# Altium PCB ATM90E3x-DB.PcbDoc
Units mil, origin at the board's own origin, x right, y up, seen from the top; angles counter-clockwise.
Board outline 4724.41 x 3543.31 mil, 2 copper layers (Top Layer, Bottom Layer); 106 components, 99 nets, 295 pads, 118 vias.
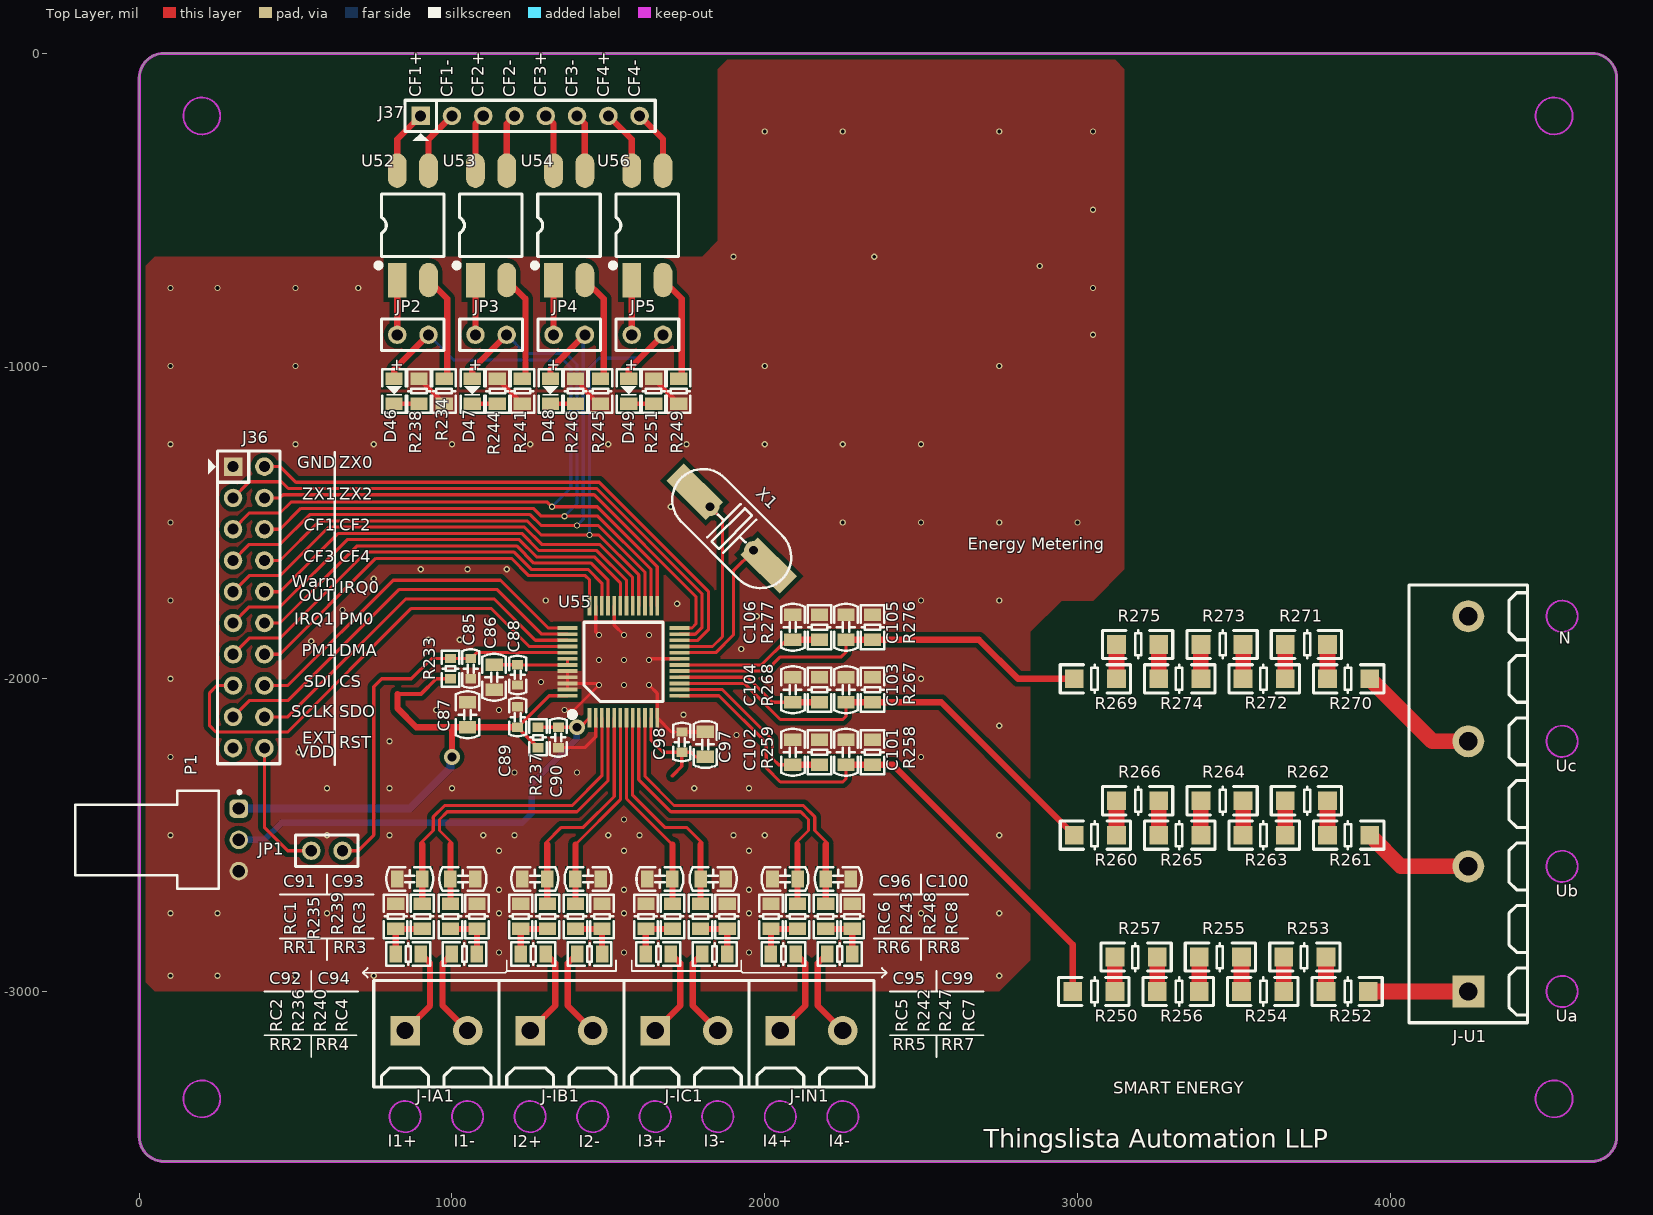
[diagram p0: Top Layer view]
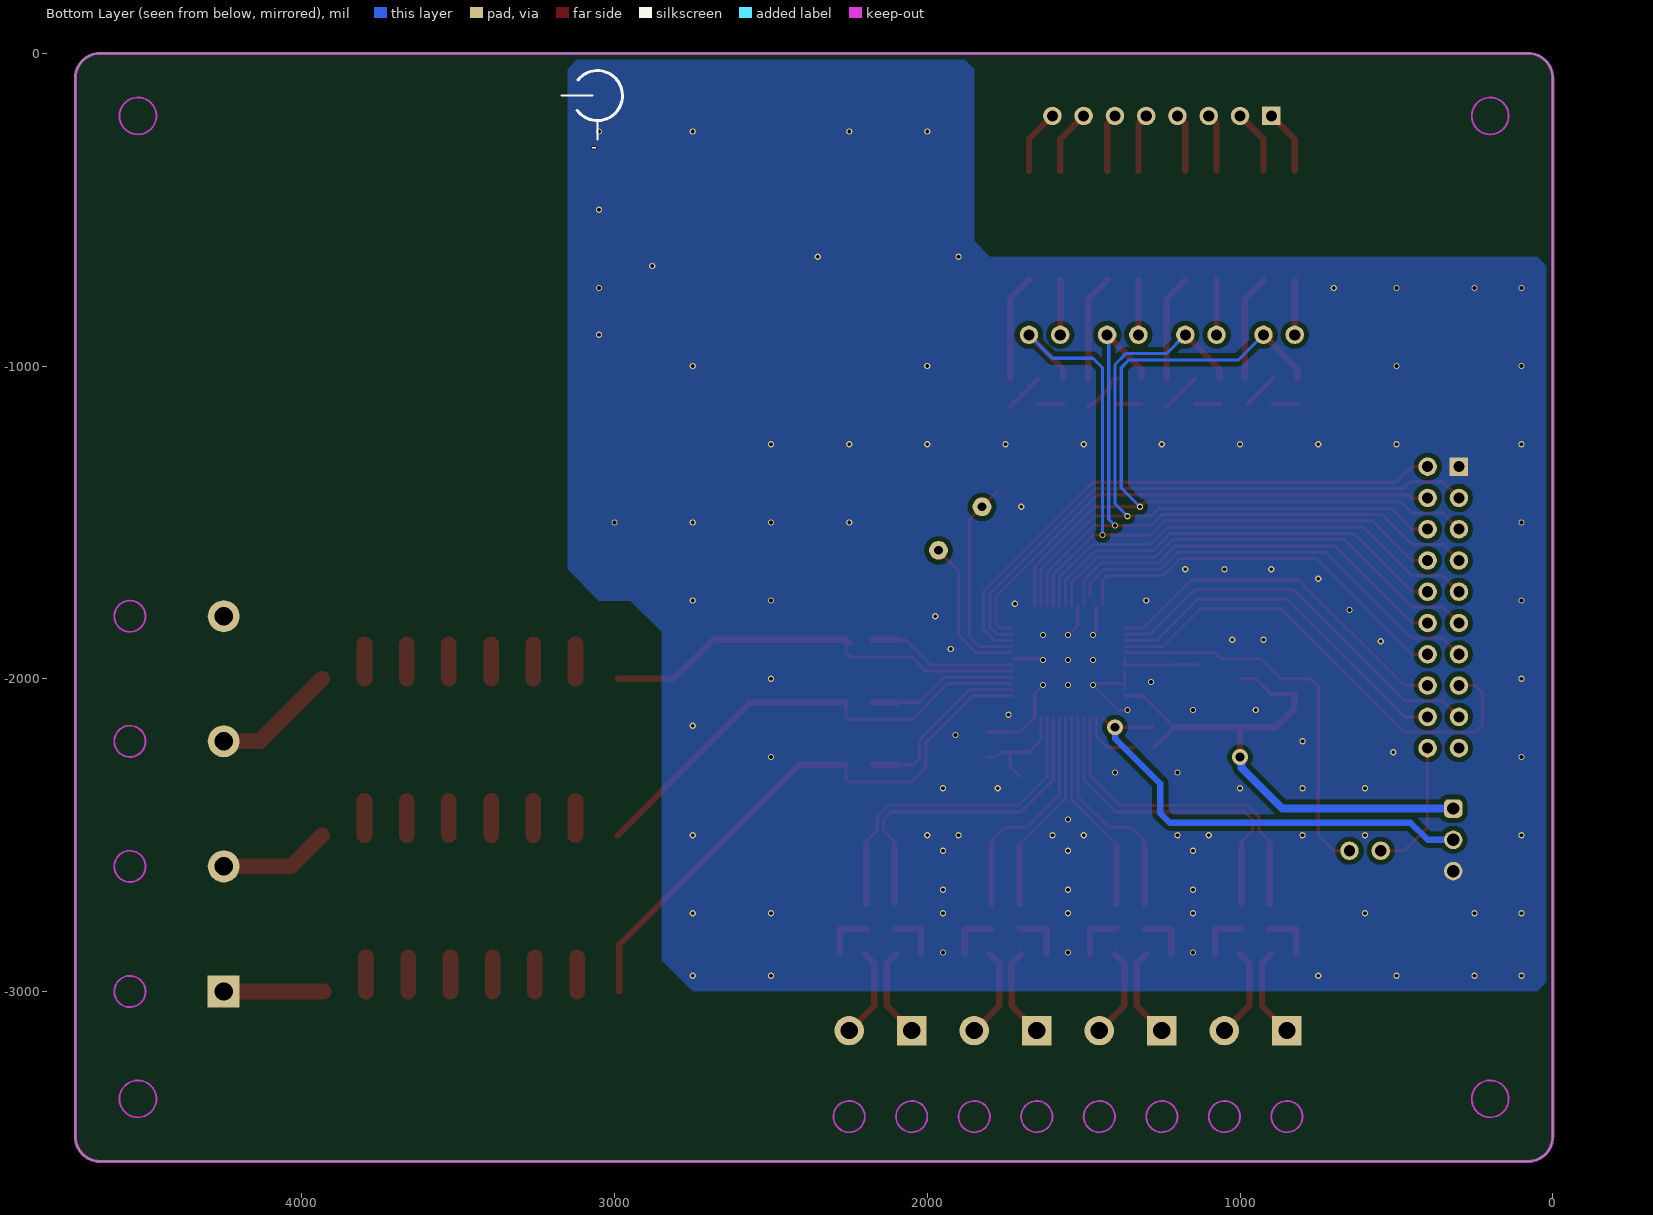
[diagram p1: Bottom Layer view, seen from below]
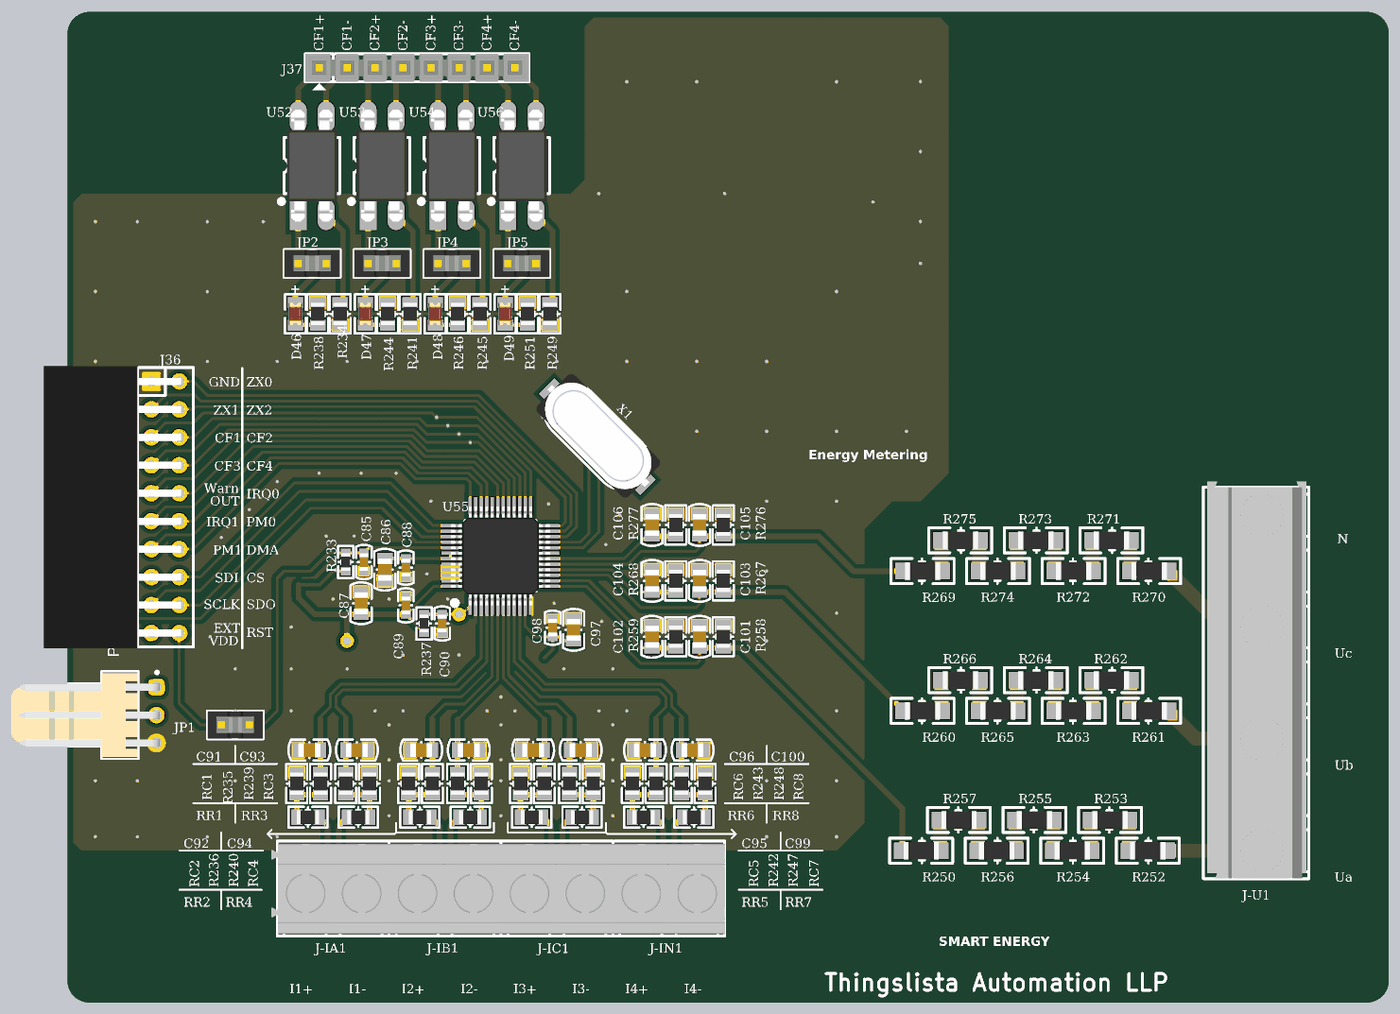
[diagram p2: 3D render of the assembled board from above, using the file's embedded part models]

## Layer stack, top to bottom
Top Solder: solder mask 0.4, Solder Resist, Dk 3.5
Top Layer: signal copper 1.4
Dielectric1: dielectric 12.6, FR-4, Dk 4.8
Bottom Layer: signal copper 1.4
Bottom Solder: solder mask 0.4, Solder Resist, Dk 3.5

## Board outline
0,-3464.57 ccw(c78.74,-3464.57) 78.74,-3543.31 4645.67,-3543.31 ccw(c4645.67,-3464.57) 4724.41,-3464.57 4724.41,-78.74 ccw(c4645.67,-78.74) 4645.67,0 78.74,0 ccw(c78.74,-78.74) 0,-78.74

## Design rules (kind name [scope] priority, off if disabled: settings)
Clearance TQFP-48 [InComponent('U7')] p1: gap=6 ignorepadtopadclearanceinfootprint=FALSE except(0: Arc-Hole Track-Hole SMDPad-Hole THPad-Hole Via-Hole Fill-Hole Poly-Hole Region-Hole Text-Hole)
Clearance Polygon [IsRegion] p2: gap=15 ignorepadtopadclearanceinfootprint=FALSE except(0: Arc-Hole Track-Hole SMDPad-Hole THPad-Hole Via-Hole Fill-Hole Poly-Hole Region-Hole Text-Hole)
Clearance [All] p3: gap=8 ignorepadtopadclearanceinfootprint=FALSE except(0: Arc-Hole Track-Hole SMDPad-Hole THPad-Hole Via-Hole Fill-Hole Poly-Hole Region-Hole Text-Hole)
MinimumSolderMaskSliver [All] p1 off: minsoldermaskwidth=10
NetAntennae [All] p1 off: netantennaetolerance=0
PolygonConnect [All] p1: connectstyle=Direct reliefconductorwidth=20 reliefentries=4 polygonreliefangle="90 Angle" airgapwidth=15
RoutingVias [All] p1: holewidth=28 width=50 viastyle="Through Hole" minholewidth=28 minwidth=50 maxholewidth=28 maxwidth=50
SilkToSilkClearance [All] p1 off: silktosilkclearance=10
SilkToSolderMaskClearance SilkscreenOverComponentPads [IsPad] p1 off: minsilkscreentomaskgap=10 clearancetoexposedcopper=TRUE
SolderMaskExpansion [All] p1: expansion=4 istentingtop=FALSE
Width [All] p1: maxlimit=100 minlimit=8 preferedwidth=10
26 further rules are at their usual default settings.

## Components (designator, comment, footprint, x,y, rotation, side; value= is the part's Value field where it differs from the comment)
C85 "0.1uF" C0603 1060,-2000 r90 top
C86 "10uF" C0805 1135,-1955 r270 top
C87 "10uF" C0805 1050,-2075 r270 top
C88 "0.1uF" C0603 1210,-2020 r90 top
C89 "0.1uF" C0603 1210,-2155 r90 top
C90 "0.1uF" C0603 1340,-2220 r90 top
C91 "18nF" C0805 825,-2640 r0 top
C92 "18nF" C0805 1305,-2640 r180 top
C93 "18nF" C0805 995,-2640 r0 top
C94 "18nF" C0805 1475,-2640 r180 top
C95 "18nF" C0805 1705,-2640 r180 top
C96 "18nF" C0805 2105,-2640 r180 top
C97 "10uF" C0805 1810,-2170 r270 top
C98 "0.1uF" C0603 1735,-2170 r270 top
C99 "18nF" C0805 1875,-2640 r180 top
C100 "18nF" C0805 2275,-2640 r180 top
C101 "18nF" C0805 2260,-2195 r270 top
C102 "18nF" C0805 2090,-2195 r270 top
C103 "18nF" C0805 2260,-1995 r270 top
C104 "18nF" C0805 2090,-1995 r270 top
C105 "18nF" C0805 2260,-1795 r270 top
C106 "18nF" C0805 2090,-1795 r270 top
D46 "Red" LED-0805R 815,-1040 r270 top
D47 "Red" LED-0805R 1065,-1040 r270 top
D48 "Red" LED-0805R 1315,-1040 r270 top
D49 "Red" LED-0805R 1565,-1040 r270 top
J36 "HDR2X10" HDR2X10 300,-1321.65 r270 top locked
J37 "HDR1X8" HDR1X8 900,-200 r0 top
J-IA1 "" TE-1776119-2 850,-3125 r0 top
J-IB1 "" TE-1776119-2 1250,-3125 r0 top
J-IC1 "" TE-1776119-2 1650,-3125 r0 top
J-IN1 "" TE-1776119-2 2050,-3125 r0 top
J-U1 "" TE-282843-4 4250,-3000 r90 top
JP1 "JMP" JMP 650,-2550 r180 top
JP2 "JMP" JMP 925,-900 r180 top
JP3 "JMP" JMP 1175,-900 r180 top
JP4 "JMP" JMP 1425,-900 r180 top
JP5 "JMP" JMP 1675,-900 r180 top
P1 "61900311021" 61900311021 25,-2515 r270 top
R233 "10K" R0603 995,-1935 r270 top
R234 "510R" R0805 975,-1120 r90 top
R235 "1K" R0805 905,-2720 r270 top
R236 "1K" R0805 1305,-2800 r90 top
R237 "0R" R0603 1275,-2220 r90 top
R238 "510R" R0805 895,-1040 r270 top
R239 "1K" R0805 995,-2720 r270 top
R240 "1K" R0805 1395,-2800 r90 top
R241 "510R" R0805 1225,-1120 r90 top
R242 "1K" R0805 1705,-2800 r90 top
R243 "1K" R0805 2105,-2800 r90 top
R244 "510R" R0805 1145,-1040 r270 top
R245 "510R" R0805 1475,-1120 r90 top
R246 "510R" R0805 1395,-1040 r270 top
R247 "1K" R0805 1795,-2800 r90 top
R248 "1K" R0805 2195,-2800 r90 top
R249 "510R" R0805 1725,-1120 r90 top
R250 "240K" R1206 3120,-3000 r180 top
R251 "510R" R0805 1645,-1040 r270 top
R252 "240K" R1206 3930,-3000 r180 top
R253 "240K" R1206 3660,-2890 r0 top
R254 "240K" R1206 3660,-3000 r180 top
R255 "240K" R1206 3390,-2890 r0 top
R256 "240K" R1206 3390,-3000 r180 top
R257 "240K" R1206 3120,-2890 r0 top
R258 "1K" R0805 2345,-2195 r270 top
R259 "1K" R0805 2175,-2195 r270 top
R260 "240K" R1206 2990,-2500 r0 top
R261 "240K" R1206 3800,-2500 r0 top
R262 "240K" R1206 3800,-2390 r180 top
R263 "240K" R1206 3530,-2500 r0 top
R264 "240K" R1206 3530,-2390 r180 top
R265 "240K" R1206 3260,-2500 r0 top
R266 "240K" R1206 3260,-2390 r180 top
R267 "1K" R0805 2345,-1995 r270 top
R268 "1K" R0805 2175,-1995 r270 top
R269 "240K" R1206 2990,-2000 r0 top
R270 "240K" R1206 3800,-2000 r0 top
R271 "240K" R1206 3800,-1890 r180 top
R272 "240K" R1206 3530,-2000 r0 top
R273 "240K" R1206 3530,-1890 r180 top
R274 "240K" R1206 3260,-2000 r0 top
R275 "240K" R1206 3260,-1890 r180 top
R276 "1K" R0805 2345,-1795 r270 top
R277 "1K" R0805 2175,-1795 r270 top
RC1 "2R4" R0805 820,-2720 r270 top
RC2 "2R4" R0805 1220,-2720 r270 top
RC3 "2R4" R0805 1080,-2800 r90 top
RC4 "2R4" R0805 1480,-2800 r90 top
RC5 "2R4" R0805 1620,-2720 r270 top
RC6 "2R4" R0805 2020,-2720 r270 top
RC7 "2R4" R0805 1880,-2800 r90 top
RC8 "2R4" R0805 2280,-2800 r90 top
RR1 "0" R0805 820,-2880 r0 top
RR2 "0" R0805 1220,-2880 r0 top
RR3 "0" R0805 1080,-2880 r180 top
RR4 "0" R0805 1480,-2880 r180 top
RR5 "0" R0805 1620,-2880 r0 top
RR6 "0" R0805 2020,-2880 r0 top
RR7 "0" R0805 1880,-2880 r180 top
RR8 "0" R0805 2280,-2880 r180 top
U52 "NEC2501" PS2501L-1 825,-725 r90 top
U53 "NEC2501" PS2501L-1 1075,-725 r90 top
U54 "NEC2501" PS2501L-1 1325,-725 r90 top
U55 "ATM90E36" TQFP-48(7X7) 1440,-2125 r90 top
U56 "NEC2501" PS2501L-1 1575,-725 r90 top
X1 "16.384MHz" XTAL-MIX-49 1825,-1450 r315 top

## Footprints (in the part's own frame and the unit in brackets; to place one, negate y for a bottom-side part, rotate by r counter-clockwise, add the part's x,y. Pads: shape width x height; smd on the part's side, far side on the other; paste and mask are expansions set on the pad)
61900311021 [mm] "2.54mm Male Left Angled Header Bottom Locking, 3p"
  rrect50% 1.5x1.5 hole 1: 1(-2.54,7.45)
  round 1.5 hole 1: 2(0,7.45) 3(2.54,7.45)
  silkscreen extent -3.99,-5.82 3.98,7.63, body extent -3.81,-5.75 3.81,7.77, height 5.83
C0603 [mil] "C0603"
  rect 30x35 smd: 1(0,0) 2(65,0)
  silkscreen extent -29,-28 94,28, body extent 1,-16 64,16, height 35
C0805 [mil] "C0805"
  rect 40x55 smd: 1(0,0) 2(80,0)
  silkscreen extent -35,-38 115,38, body extent 1,-25 79,25, height 39
HDR1X8 [mm] "Connector; Header; 8 Position"
  rect 1.5x1.5 hole 0.9: 1(0,0)
  round 1.5 hole 0.9: 2(2.54,0) 3(5.08,0) 4(7.62,0) 5(10.16,0) 6(12.7,0) 7(15.24,0) 8(17.78,0)
  silkscreen extent -1.27,-2.03 19.05,1.27, body extent -1.27,-1.27 19.05,1.27, height 8.38
HDR2X10 [mm]
  rect 1.5x1.5 hole 0.9: 1(0,0)
  round 1.5 hole 0.9: 2(0,2.54) 3(2.54,0) 4(2.54,2.54) 5(5.08,0) 6(5.08,2.54) 7(7.62,0) 8(7.62,2.54) 9(10.16,0) 10(10.16,2.54) 11(12.7,0) 12(12.7,2.54) 13(15.24,0) 14(15.24,2.54) 15(17.78,0) 16(17.78,2.54) 17(20.32,0) 18(20.32,2.54) 19(22.86,0) 20(22.86,2.54)
  silkscreen extent -1.27,-2.03 24.13,3.81, body extent -1.4,-9.77 24.25,2.83, height 5.04
JMP [mm] "JMP"
  round 1.5 hole 0.9: 1(0,0) 2(2.54,0)
  silkscreen extent -1.27,-1.27 3.81,1.27, body extent -1.27,-1.27 3.81,1.27, height 8.51
LED-0805R [mil] "LED 0805, Red"
  rect 40x55 smd: A(0,0) K(80,0)
  silkscreen extent -30,-38 110,38, body extent 0,-25 80,25, height 43
PS2501L-1 [mil] "PS2501L-1"
  rect 110.24x60 smd: 1(0,0)
  oval 110.24x60 smd: 2(0,-100) 3(350,-100) 4(350,0)
  silkscreen extent 39,-149 275,68, body extent -25,-140 375,41, height 152
R0603 [mil] "R0603"
  rect 30x35 smd: 1(0,0) 2(65,0)
  silkscreen extent -25,-28 90,28, body extent 1,-16 64,16, height 16
R0805 [mil] "R0805"
  rect 40x55 smd: 1(0,0) 2(80,0)
  silkscreen extent -30,-38 110,38, body extent 1,-25 79,25, height 20
R1206 [mil] "R1206"
  rect 60x60 smd: 1(0,0) 2(135,0)
  silkscreen extent -45,-45 180,45, body extent 5,-31 130,32, height 22
TE-282843-4 [mm]
  rect 2.6x2.6 hole 1.5: 1(0,0)
  round 2.6 hole 1.5: 2(10.16,0) 3(20.32,0) 4(30.48,0)
  silkscreen extent -2.54,-4.8 33.02,4.8, body extent -2.54,-4.57 33.52,4.43, height 15.22
TE-1776119-2 [mm]
  rect 2.4x2.4 hole 1.4: 1(0,0)
  round 2.4 hole 1.4: 2(5.08,0)
  silkscreen extent -2.54,-4.57 7.62,4.06, body extent -3.09,-4.39 7.67,3.81, height 10.04
TQFP-48(7X7) [mm] "PSC-4167; Outline: 7.0mm x 7.0mm x 1.0mm; Pitch: 0.5 mm"
  rect 1.6x0.3 smd: 1(0,0) 2(0,-0.5) 3(0,-1) 4(0,-1.5) 5(0,-2) 6(0,-2.5) 7(0,-3) 8(0,-3.5) 9(0,-4) 10(0,-4.5) 11(0,-5) 12(0,-5.5) 25(9.1,-5.5) 26(9.1,-5) 27(9.1,-4.5) 28(9.1,-4) 29(9.1,-3.5) 30(9.1,-3) 31(9.1,-2.5) 32(9.1,-2) 33(9.1,-1.5) 34(9.1,-1) 35(9.1,-0.5) 36(9.1,0)
  rect 0.3x1.6 smd: 13(1.8,-7.3) 14(2.3,-7.3) 15(2.8,-7.3) 16(3.3,-7.3) 17(3.8,-7.3) 18(4.3,-7.3) 19(4.8,-7.3) 20(5.3,-7.3) 21(5.8,-7.3) 22(6.3,-7.3) 23(6.8,-7.3) 24(7.3,-7.3) 37(7.3,1.8) 38(6.8,1.8) 39(6.3,1.8) 40(5.8,1.8) 41(5.3,1.8) 42(4.8,1.8) 43(4.3,1.8) 44(3.8,1.8) 45(3.3,1.8) 46(2.8,1.8) 47(2.3,1.8) 48(1.8,1.8)
  silkscreen extent 0.08,-5.96 7.76,1.6, body extent 0.05,-7.25 9.05,1.75, height 1.6
XTAL-MIX-49 [mm]
  rect 4.5x2 smd: 1(-1.75,0) 2(6.75,0)
  round 1.524 hole 0.711: 1(0,0) 2(5,0)
  silkscreen extent -3.3,-2.5 8.3,2.5, body extent -3.75,-2.29 8.75,2.51, height 4.05

## Part data
C85 C86 C87 C88 C89 C90 C91 C92 C93 C94 C95 C96 C97 C98 C99 C100 C101 C102 C103 C104 C105 C106: library part CAP
D46 D47 D48 D49: library part LED
J-IA1 J-IB1 J-IC1 J-IN1: library part Terminal-Screw-2
J-U1: library part Terminal-Screw-4
P1: library part CMP-1502-00593-2, Color=Beige, Contact Resistance=20mΩ, Current Rating=3A, Flammability Rating="UL94 V-0", Insulation Resistance=1GΩ, Max Operating Temperature=105°C, Min Operating Temperature=-40°C, Operating Supply Voltage=250V, Connector Type="Male Pin", Contact Gender=Male, Contact Material=Copper, Contact Mating Length=7.62mm, Contact Plating=Tin, Fastening Type=Friction, Gender=Male, Height=3.3mm, Housing Material=Nylon, Insulation=Insulated, Lead Pitch=2.54mm, Length=7.62mm, Mount="Through Hole", NexarPartId=18818221, Number of Contacts=3, Number of Pins=3, Number of Positions=3, Number of Rows=1, Packaging=Bulk, Pitch=2.54mm, REACH SVHC=Unknown, RoHS=Compliant, Termination="Through Hole", Voltage Rating=250V, Width=7.66mm
R233 R234 R235 R236 R237 R238 R239 R240 R241 R242 R243 R244 R245 R246 R247 R248 R249 R250 R251 R252 R253 R254 R255 R256 R257 R258 R259 R260 R261 R262 R263 R264 R265 R266 R267 R268 R269 R270 R271 R272 R273 R274 R275 R276 R277 RC1 RC2 RC3 RC4 RC5 RC6 RC7 RC8 RR1 RR2 RR3 RR4 RR5 RR6 RR7 RR8: library part RES
U55: library part ATM90E3X, "ATM90E3X"
X1: library part XTAL-T

## Via types
v1: diameter 20, hole 12, Top Layer to Bottom Layer, 116 vias
v2: diameter 50, hole 28, Top Layer to Bottom Layer, 2 vias

## Nets (pads, with @x,y where several pads share a name; then routed paths per layer and width w, separated by ;. In a path a pad name is that pad's centre, name@x,y a point inside that pad or via, vN(x,y) a via of type N, cw(c..) or ccw(c..) an arc to the next point about the centre after c; other vN are vias at no path point)
AVDD33: C90.2 P1.2 R237.2 U55.1 | length 1479.4
  Top Layer w10: C90.2 v2(1400,-2155) 1410,-2155 U55.1
  Top Layer w12: R237.2@1280,-2155 C90.2
  Bottom Layer w20: P1.2 400,-2515 455,-2460 1225,-2460 1255,-2430 1255,-2335 1398.61,-2191.39 1398.61,-2156.39 v2(1400,-2155)
CF1: D46.A J36.5 JP2.1 U55.25 | length 2756.9
  Top Layer w10: J36.5 351.65,-1470 450,-1470 485,-1435 1305,-1435 v1(1320,-1450) 1464.71,-1450 1656.54,-1641.83 U55.25
  Top Layer w20: D46.A 815,-1010 JP2.1
  Bottom Layer w10: JP2.1 1005,-980 1355,-980 1380,-1005 1380,-1390 v1(1320,-1450)
CF2: D47.A J36.6 JP3.1 U55.26 | length 2413.2
  Top Layer w10: J36.6 450,-1521.65 516.65,-1455 1260,-1455 1285,-1480 v1(1360,-1480) 1466.42,-1480 1636.85,-1650.43 U55.26
  Top Layer w20: D47.A 1065,-1010 JP3.1
  Bottom Layer w10: JP3.1 1235,-960 1365,-960 1400,-995 1400,-1440 v1(1360,-1480)
CF3: D48.A J36.7 JP4.1 U55.27 | length 2360.7
  Top Layer w10: J36.7 351.65,-1570 450,-1570 545,-1475 1250,-1475 1285,-1510 v1(1400,-1510) 1468.14,-1510 1617.16,-1659.03 U55.27
  Top Layer w20: D48.A 1315,-1010 JP4.1
  Bottom Layer w10: v1(1400,-1510) 1420,-1490 JP4.1@1420,-905
CF4: D49.A J36.8 JP5.1 U55.28 | length 2419.6
  Top Layer w10: J36.8 450,-1621.65 576.65,-1495 1240,-1495 1285,-1540 v1(1440,-1540) 1469.85,-1540 1597.48,-1667.63 U55.28
  Top Layer w20: D49.A 1565,-1010 JP5.1
  Bottom Layer w10: v1(1440,-1540) 1440,-1005 1470,-975 1600,-975 JP5.1
CS: J36.16 U55.37 | length 1187
  Top Layer w10: J36.16@378.35,-2021.65 J36.16@389.17,-2010.83 ; J36.16 475,-2021.65 811.65,-1685 1155,-1685 1307.28,-1837.28 U55.37@1369.13,-1837.28
DMA: J36.14 U55.36 | length 1278.8
  Top Layer w10: J36.14 450,-1921.65 756.65,-1615 1190.29,-1615 1245.29,-1670 1426.72,-1670 1440,-1683.28 U55.36
GND: C85.1 C86.2 C87.1 C88.1 C89.2 C90.1 C91.1 C92.2 C93.2 C94.1 C95.2 C96.2 C97.1 C98.1 C99.1 C100.1 C101.1 C102.1 C103.1 C104.1 C105.1 C106.1 J36.1 P1.3 R234.1 R238.1 R241.1 R244.1 R245.1 R246.1 R249.1 R251.1 R258.1 R259.1 R267.1 R268.1 R276.1 R277.1 RC1.1 RC2.1 RC3.2 RC4.2 RC5.1 RC6.1 RC7.2 RC8.2 U55.2 U55.12 U55.19 U55.32 U55.35 U55.44 U55.45 U55.46 U55.47 | length 1586.4
  Top Layer w10: C90.1 1425,-2220 1459.68,-2185.32 U55.2 ; v1(1360,-2100) 1390,-2100 v1(1470,-2020) 1464.76,-2014.76 U55.46 ; U55.47@1369.13,-2031.63 U55.46 ; U55.44 U55.45 U55.46 ; U55.35 1459.68,-1849.68 v1(1470,-1860) ; U55.32 1518.74,-1828.74 v1(1550,-1860) ; v1(1630,-2020) 1656.54,-2046.53 U55.12 1701.54,-2170 C98.1 ; v1(1630,-1940) 1633.98,-1936.02 U55.19
  Top Layer w12: C98.1 C97.1@1805,-2170
  Top Layer w15: R238.1 R234.1 ; R244.1 R241.1 R241.1@1235,-1130 ; R246.1 1402.5,-1040 1415,-1052.5 1415,-1067.5 1467.5,-1120 R245.1 R245.1@1485,-1130 ; R251.1 R249.1 R249.1@1735,-1130
  other v1: 100,-2950 250,-2950 500,-2950 750,-2950 2500,-2950 2750,-2950 1150,-2875 1550,-2875 1950,-2875 100,-2750 250,-2750 600,-2750 1150,-2750 1550,-2750 1950,-2750 2500,-2750 2750,-2750 1150,-2675 1550,-2675 1950,-2675 1150,-2550 1550,-2550 1950,-2550 100,-2500 600,-2500 800,-2500 1100,-2500 1200,-2500 1500,-2500 1600,-2500 1900,-2500 2000,-2500 2750,-2500 1550,-2450 600,-2350 800,-2350 1000,-2350 1775,-2350 1950,-2350 1200,-2300 1400,-2300 100,-2250 2500,-2250 510,-2235 800,-2200 1910,-2180 2750,-2150 1740,-2115 950,-2100 1150,-2100 1550,-2020 1285,-2010 100,-2000 2500,-2000 1470,-1940 1550,-1940 1925,-1905 550,-1880 925,-1875 1025,-1875 1630,-1860 1975,-1800 650,-1780 1720,-1760 100,-1750 1300,-1750 2500,-1750 2750,-1750 750,-1680 900,-1650 1050,-1650 1175,-1650 100,-1500 2250,-1500 2500,-1500 2750,-1500 3000,-1500 1700,-1450 100,-1250 500,-1250 750,-1250 1000,-1250 1250,-1250 1500,-1250 1750,-1250 2000,-1250 2250,-1250 2500,-1250 100,-1000 500,-1000 2000,-1000 2750,-1000 3050,-900 100,-750 250,-750 500,-750 700,-750 3050,-750 2880,-680 1900,-650 2350,-650 3050,-500 2000,-250 2250,-250 2750,-250 3050,-250
IAN: C93.1 R239.1 U55.4 | length 1073
  Top Layer w10: 1000,-2525 960,-2485 960,-2450 985,-2425 1400,-2425 1499.06,-2325.95 U55.4
  Top Layer w20: R239.1 C93.1 995,-2530
IAP: C91.2 R235.1 U55.3 | length 1069.2
  Top Layer w10: 900,-2525 940,-2485 940,-2441.72 976.72,-2405 1385,-2405 1479.37,-2310.63 U55.3
  Top Layer w20: R235.1 C91.2 905,-2530
IBN: C94.2 R240.2 U55.6 | length 647.3
  Top Layer w10: 1400,-2525 1538.42,-2386.57 U55.6
  Top Layer w20: R240.2 C94.2 1395,-2530
IBP: C92.1 R236.2 U55.5 | length 721.6
  Top Layer w10: 1300,-2525 1350,-2475 1420,-2475 1518.74,-2376.26 U55.5
  Top Layer w20: R236.2 C92.1 1305,-2530
ICN: C99.2 R247.2 U55.8 | length 723
  Top Layer w10: U55.8 1577.79,-2372.8 1680,-2475 1750,-2475 1800,-2525
  Top Layer w20: R247.2 C99.2 1795,-2530
ICP: C95.1 R242.2 U55.7 | length 648.8
  Top Layer w10: U55.7 1558.11,-2383.11 1700,-2525
  Top Layer w20: R242.2 C95.1 1705,-2530
INN: C100.2 R248.2 U55.10 | length 1073.5
  Top Layer w10: U55.10 1617.16,-2312.16 1710,-2405 2123.28,-2405 2160,-2441.72 2160,-2485 2200,-2525
  Top Layer w20: R248.2 C100.2 2195,-2530
INP: C96.1 R243.2 U55.9 | length 1074.4
  Top Layer w10: U55.9 1597.48,-2322.48 1700,-2425 2115,-2425 2140,-2450 2140,-2485 2100,-2525
  Top Layer w20: R243.2 C96.1 2105,-2530
IRQ0: J36.10 U55.30 | length 1379.4
  Top Layer w10: J36.10 450,-1721.65 636.65,-1535 1223.43,-1535 1278.43,-1590 1463.28,-1590 1558.11,-1684.83 U55.30
IRQ1: J36.11 U55.31 | length 1479.5
  Top Layer w10: J36.11 351.65,-1770 450,-1770 665,-1555 1215.15,-1555 1270.15,-1610 1455,-1610 1538.42,-1693.43 U55.31
N: J-U1.4
NetC85_2: C85.2 JP1.1 R233.1 U55.41 | length 1259.9
  Top Layer w10: JP1.1 700,-2550 750,-2500 750,-2025 775,-2000 870,-2000 935,-1935 R233.1 C85.2 1078.66,-1916.34 U55.41
NetC86_1: C86.1 C88.2 U55.42 U55.43 | length 252.8
  Top Layer w10: C88.2@1210.71,-1955.71 U55.43 ; U55.43@1369.13,-1955.39 U55.42
  Top Layer w12: C86.1 C88.2
NetC97_2: C97.2 C98.2 U55.11 | length 354.4
  Top Layer w10: U55.11 1636.85,-2196.85 1675,-2235 C98.2 1765,-2235 1780,-2250 C97.2
  Top Layer w12: 1705,-2310 1735,-2280 C98.2
NetD46_K: D46.K R238.2 | length 80
  Top Layer w15: D46.K R238.2
NetD47_K: D47.K R244.2 | length 80
  Top Layer w15: D47.K R244.2
NetD48_K: D48.K R246.2 | length 80
  Top Layer w15: D48.K R246.2
NetD49_K: D49.K R251.2 | length 80
  Top Layer w15: D49.K R251.2
NetJ37_1: J37.1 U52.4 | length 206.1
  Top Layer w20: U52.4 825,-275 J37.1
NetJ37_2: J37.2 U52.3 | length 206.1
  Top Layer w20: U52.3 925,-275 J37.2
NetJ37_3: J37.3 U53.4 | length 185.4
  Top Layer w20: U53.4 1075,-225 J37.3
NetJ37_4: J37.4 U53.3 | length 185.4
  Top Layer w20: U53.3 1175,-225 J37.4
NetJ37_5: J37.5 U54.4 | length 185.4
  Top Layer w20: J37.5 1325,-225 U54.4
NetJ37_6: J37.6 U54.3 | length 185.4
  Top Layer w20: J37.6 1425,-225 U54.3
NetJ37_7: J37.7 U56.4 | length 206.1
  Top Layer w20: J37.7 1575,-275 U56.4
NetJ37_8: J37.8 U56.3 | length 206.1
  Top Layer w20: J37.8 1675,-275 U56.3
NetJ-IA1_1: J-IA1.1 RR1.2 | length 290.6
  Top Layer w20: J-IA1.1 930,-3045 930,-2910 RR1.2
NetJ-IA1_2: J-IA1.2 RR3.2 | length 290.6
  Top Layer w20: RR3.2 970,-2910 970,-3045 J-IA1.2
NetJ-IB1_1: J-IB1.1 RR2.2 | length 290.6
  Top Layer w20: J-IB1.1 1330,-3045 1330,-2910 RR2.2
NetJ-IB1_2: J-IB1.2 RR4.2 | length 290.6
  Top Layer w20: RR4.2 1370,-2910 1370,-3045 J-IB1.2
NetJ-IC1_1: J-IC1.1 RR5.2 | length 290.6
  Top Layer w20: J-IC1.1 1730,-3045 1730,-2910 RR5.2
NetJ-IC1_2: J-IC1.2 RR7.2 | length 290.6
  Top Layer w20: RR7.2 1770,-2910 1770,-3045 J-IC1.2
NetJ-IN1_1: J-IN1.1 RR6.2 | length 290.6
  Top Layer w20: J-IN1.1 2130,-3045 2130,-2910 RR6.2
NetJ-IN1_2: J-IN1.2 RR8.2 | length 290.6
  Top Layer w20: RR8.2 2170,-2910 2170,-3045 J-IN1.2
NetJP2_2: JP2.2 U52.1 | length 175
  Top Layer w20: JP2.2 U52.1
NetJP3_2: JP3.2 U53.1 | length 175
  Top Layer w20: JP3.2 U53.1
NetJP4_2: JP4.2 U54.1 | length 175
  Top Layer w20: JP4.2 U54.1
NetJP5_2: JP5.2 U56.1 | length 175
  Top Layer w20: JP5.2 U56.1
NetR234_2: R234.2 U52.2 | length 339.9
  Top Layer w20: U52.2 985,-785 R234.2@985,-1040
NetR235_2: R235.2 RC1.2 RR1.1 | length 165
  Top Layer w20: RR1.1 RC1.2 R235.2
NetR236_1: R236.1 RC2.2 RR2.1 | length 165
  Top Layer w20: RR2.1 RC2.2 R236.1
NetR239_2: R239.2 RC3.1 RR3.1 | length 165
  Top Layer w20: R239.2 RC3.1 RR3.1
NetR240_1: R240.1 RC4.1 RR4.1 | length 165
  Top Layer w20: R240.1 RC4.1 RR4.1
NetR241_2: R241.2 U53.2 | length 339.9
  Top Layer w20: U53.2 1235,-785 R241.2@1235,-1040
NetR242_1: R242.1 RC5.2 RR5.1 | length 165
  Top Layer w20: RR5.1 RC5.2 R242.1
NetR243_1: R243.1 RC6.2 RR6.1 | length 165
  Top Layer w20: RR6.1 RC6.2 R243.1
NetR245_2: R245.2 U54.2 | length 339.9
  Top Layer w20: U54.2 1485,-785 R245.2@1485,-1040
NetR247_1: R247.1 RC7.1 RR7.1 | length 165
  Top Layer w20: R247.1 RC7.1 RR7.1
NetR248_1: R248.1 RC8.1 RR8.1 | length 165
  Top Layer w20: R248.1 RC8.1 RR8.1
NetR249_2: R249.2 U56.2 | length 339.9
  Top Layer w20: U56.2 1735,-785 R249.2@1735,-1040
NetR250_1: R250.1 R257.1 | length 110
  Top Layer w50: R250.1 R257.1
NetR252_2: R252.2 R253.2 | length 110
  Top Layer w50: R252.2 R253.2
NetR253_1: R253.1 R254.1 | length 110
  Top Layer w50: R254.1 R253.1
NetR254_2: R254.2 R255.2 | length 110
  Top Layer w50: R254.2 R255.2
NetR255_1: R255.1 R256.1 | length 110
  Top Layer w50: R256.1 R255.1
NetR256_2: R256.2 R257.2 | length 110
  Top Layer w50: R256.2 R257.2
NetR260_2: R260.2 R266.2 | length 110
  Top Layer w50: R260.2 R266.2
NetR261_1: R261.1 R262.1 | length 110
  Top Layer w50: R261.1 R262.1
NetR262_2: R262.2 R263.2 | length 110
  Top Layer w50: R263.2 R262.2
NetR263_1: R263.1 R264.1 | length 110
  Top Layer w50: R263.1 R264.1
NetR264_2: R264.2 R265.2 | length 110
  Top Layer w50: R265.2 R264.2
NetR265_1: R265.1 R266.1 | length 110
  Top Layer w50: R265.1 R266.1
NetR269_2: R269.2 R275.2 | length 110
  Top Layer w50: R269.2 R275.2
NetR270_1: R270.1 R271.1 | length 110
  Top Layer w50: R270.1 R271.1
NetR271_2: R271.2 R272.2 | length 110
  Top Layer w50: R272.2 R271.2
NetR272_1: R272.1 R273.1 | length 110
  Top Layer w50: R272.1 R273.1
NetR273_2: R273.2 R274.2 | length 110
  Top Layer w50: R274.2 R273.2
NetR274_1: R274.1 R275.1 | length 110
  Top Layer w50: R274.1 R275.1
NetU55_20: U55.20 X1.2 | length 492.9
  Top Layer w10: U55.20 1843.66,-1916.34 1900,-1860 1900,-1655 X1.2@1965,-1590
NetU55_21: U55.21 X1.1 | length 651.2
  Top Layer w10: U55.21 1833.35,-1896.65 1865,-1865 1865,-1490 X1.1@1776.28,-1401.28
PM0: J36.12 U55.33 | length 1329.2
  Top Layer w10: J36.12 450,-1821.65 696.65,-1575 1206.86,-1575 1261.86,-1630 1445,-1630 1499.37,-1684.37 U55.33@1499.37,-1766.73
PM1: J36.13 U55.34 | length 1396.5
  Top Layer w10: J36.13 351.65,-1870 450,-1870 725,-1595 1198.58,-1595 1253.58,-1650 1435,-1650 1479.37,-1694.37 1479.37,-1735
RST: J36.20 JP1.2 | length 434.4
  Top Layer w10: J36.20 400,-2475 475,-2550 JP1.2
SCLK: J36.17 U55.38 | length 1296.5
  Top Layer w10: J36.17 351.65,-2070 475,-2070 830,-1715 1145,-1715 1287.28,-1857.28 U55.38
SDI: J36.15 U55.40 | length 1556.1
  Top Layer w10: J36.15 248.35,-2021.65 225,-2045 225,-2150 245,-2170 475,-2170 870,-1775 1125,-1775 1246.65,-1896.65 U55.40
SDO: J36.18 U55.39 | length 1187.9
  Top Layer w10: J36.18@388.35,-2121.65 J36.18@394.17,-2115.83 ; J36.18 475,-2121.65 851.65,-1745 1135,-1745 1266.65,-1876.65 U55.39@1369.13,-1876.65
UA: J-U1.1 R252.1 | length 320
  Top Layer w50: R252.1 J-U1.1
UB: J-U1.2 R261.2 | length 356.4
  Top Layer w50: R261.2 4035,-2600 J-U1.2
UC: J-U1.3 R270.2 | length 397.8
  Top Layer w50: R270.2 4135,-2200 J-U1.3
VAN: C102.2 R259.2 U55.14 | length 582.4
  Top Layer w10: U55.14 1864.45,-2034.45 2025,-2195 2025,-2255 2045,-2275 C102.2
  Top Layer w20: C102.2 R259.2
VAP: C101.2 R250.2 R258.2 U55.13 | length 1846
  Top Layer w10: U55.13 1854.13,-2054.13 2005,-2205 2005,-2285 2050,-2330 2250,-2330 2260,-2320 C101.2@2260,-2285
  Top Layer w20: C101.2 R258.2 2410,-2275 2985,-2850 R250.2
VBN: C104.2 R268.2 U55.16 | length 480.7
  Top Layer w10: U55.16 1945.08,-1995.08 2025,-2075 C104.2
  Top Layer w20: C104.2 R268.2
VBP: C103.2 R260.1 R267.2 U55.15 | length 1535.5
  Top Layer w10: U55.15 1934.76,-2014.76 2050,-2130 2250,-2130 2260,-2120 2260,-2085 C103.2
  Top Layer w20: C103.2 R267.2 2565,-2075 R260.1
VCC: C87.2 C89.1 P1.1 R233.2 R237.1 U55.48 | length 1799.6
  Top Layer w10: C89.1 1310.87,-2054.13 U55.48
  Top Layer w12: 826,-2049 901,-2049 950,-2000 R233.2 ; C89.1 R237.1
  Top Layer w20: 826,-2049 826,-2095 886,-2155 1000,-2155 ; v2(1000,-2250) 1000,-2155 ; C89.1 C87.2 1000,-2155
  Bottom Layer w25: P1.1 865,-2415 995.22,-2284.78 995.22,-2254.78 v2(1000,-2250)
VCN: C106.2 R277.2 U55.18 | length 481
  Top Layer w10: U55.18 1989.29,-1955.71 2070,-1875 C106.2
  Top Layer w20: C106.2 R277.2
VCP: C105.2 R269.1 R276.2 U55.17 | length 1379.4
  Top Layer w10: U55.17 2004.61,-1975.39 2050,-1930 2245,-1930 2260,-1915 C105.2@2260,-1885
  Top Layer w20: C105.2@2250,-1885 C105.2@2260,-1885 ; C105.2 R276.2 2685,-1875 2810,-2000 R269.1
VDD_EXT: J36.19
WARNOUT: J36.9 U55.29 | length 1520.7
  Top Layer w10: J36.9 351.65,-1670 450,-1670 605,-1515 1231.72,-1515 1286.72,-1570 1471.57,-1570 1577.79,-1676.23 U55.29
ZX0: J36.2 U55.22 | length 1814.6
  Top Layer w10: J36.2 450.83,-1321.65 500.83,-1371.65 1471.21,-1371.65 1820,-1720.44 1820,-1843.28 1786.32,-1876.97 U55.22
ZX1: J36.3 U55.23 | length 1858.2
  Top Layer w10: J36.3 351.65,-1370 455,-1370 476.65,-1391.65 1462.93,-1391.65 1800,-1728.73 1800,-1835 1777.4,-1857.6 U55.23@1727.4,-1857.6
ZX2: J36.4 U55.24 | length 1664.7
  Top Layer w10: J36.4 450,-1421.65 460,-1411.65 1454.64,-1411.65 1780,-1737.01 1780,-1825 1767.4,-1837.6 U55.24

## Polygon pours and split planes (outlines as drawn)
GND on Bottom Layer "Top Overlay-No Net" (solid, remove dead copper, pour order 3): 0,0 0,-3550 4724.41,-3550 4724.41,0
GND on Top Layer "Top Overlay-No Net" (solid, remove dead copper, pour order 2): 0,0 0,-3550 4724.41,-3550 4724.41,0

## Keep-outs
Keep-Out Layer:
  circle w6: c200,-200 r59.06
  circle w6: c200,-3343.31 r59.06
  circle w6: c4524.41,-200 r59.06
  circle w6: c4550,-1800 r50
  circle w6: c4550,-2200 r50
  circle w6: c4550,-2600 r50
  circle w6: c4550,-3000 r50
  circle w6: c850,-3400 r50
  circle w6: c1050,-3400 r50
  circle w6: c1250,-3400 r50
  circle w6: c1450,-3400 r50
  circle w6: c1650,-3400 r50
  circle w6: c1850,-3400 r50
  circle w6: c2050,-3400 r50
  circle w6: c2250,-3400 r50
  circle w6: c4524.41,-3343.31 r59.06
  lines w10: 0,-3464.57 ccw(c78.74,-3464.57) 78.74,-3543.31 4645.67,-3543.31 ccw(c4645.67,-3464.57) 4724.41,-3464.57 4724.41,-78.74 ccw(c4645.67,-78.74) 4645.67,0 78.74,0 ccw(c78.74,-78.74) 0,-78.74 0,-3464.57

## Other copper
Top Layer:
  pour cut-out: 3100,0 3150,-50 3150,-1650 3050,-1750 2950,-1750 2850,-1850 2850,-2900 2750,-3000 50,-3000 0,-2950 0,-3550 4724.41,-3550 4724.41,0
  pour cut-out: 0,0 0,-700 50,-650 1800,-650 1850,-600 1850,-50 1900,0
Bottom Layer:
  pour cut-out: 0,0 0,-700 50,-650 1800,-650 1850,-600 1850,-50 1900,0
  pour cut-out: 3100,0 3150,-50 3150,-1650 3050,-1750 2950,-1750 2850,-1850 2850,-2900 2750,-3000 50,-3000 0,-2950 0,-3550 4724.41,-3550 4724.41,0

## Silkscreen, mask and mechanical layers (free items; w line width, h text height)
Top Overlay:
  lines w6: 400,-3140 695,-3140 ; 400,-3000 700,-3000 ; 450,-2830 750,-2830 ; 450,-2690 750,-2690 ; 550,-3210 550,-3140 ; 550,-3000 550,-2935 ; 600,-2900 600,-2830 ; 600,-2690 600,-2625 ; 730,-2955 715,-2940 ; 730,-2925 715,-2940 ; 1175,-2900 1175,-2935 ; 1525,-2900 1525,-2935 1175,-2935 ; 1575,-2900 1575,-2935 1595,-2935 ; 1585,-2935 1925,-2935 ; 1925,-2900 1925,-2935 ; 2350,-2830 2650,-2830 ; 2350,-2690 2650,-2690 ; 2375,-2955 2390,-2940 ; 2375,-2925 2390,-2940 ; 2400,-3140 2700,-3140 ; 2400,-3000 2700,-3000 ; 2500,-2900 2500,-2830 ; 2500,-2690 2500,-2625 ; 2550,-3210 2550,-3140 ; 2550,-3000 2550,-2935 ; 715,-2940 1170,-2940 1175,-2935 ; 1925,-2935 1930,-2940 2390,-2940
  lines w8: 625,-2275 625,-1275
  text "CF1+" at 915,-140 h65 r90
  text "CF1-" at 1015,-140 h65 r90
  text "CF2+" at 1115,-140 h65 r90
  text "CF2-" at 1215,-140 h65 r90
  text "CF3+" at 1315,-140 h65 r90
  text "CF3-" at 1415,-140 h65 r90
  text "CF4+" at 1515,-140 h65 r90
  text "CF4-" at 1615,-140 h65 r90
  text "GND" at 505,-1340 h65
  text "ZX0" at 640,-1340 h65
  text "ZX1" at 521.87,-1440 h65
  text "ZX2" at 640,-1440 h65
  text "CF1" at 526.37,-1540 h65
  text "CF2" at 640,-1540 h65
  text "Energy Metering" at 2650,-1600 h65
  text "CF3" at 524.81,-1640 h65
  text "CF4" at 640,-1640 h65
  text "Warn" at 488.29,-1720 h65
  text "IRQ0" at 640,-1740 h65
  text "OUT" at 509.88,-1765 h65
  text "IRQ1" at 495.79,-1840 h65
  text "PM0" at 640,-1840 h65
  text "N" at 4540,-1900 h65
  text "PM1" at 519.93,-1940 h65
  text "DMA" at 640,-1940 h65
  text "SDI" at 526.48,-2040 h65
  text "CS" at 640,-2040 h65
  text "SCLK" at 486.41,-2135 h65
  text "SDO" at 640,-2135 h65
  text "EXT" at 521.93,-2220 h65
  text "RST" at 640,-2235 h65
  text "VDD" at 506.22,-2265 h65
  text "Uc" at 4530,-2310 h65
  text "Ub" at 4530,-2710 h65
  text "Ua" at 4530,-3110 h65
  text "SMART ENERGY" at 3115,-3340 h65
  text "Thingslista Automation LLP" at 2700,-3500.01 h60
  text "I1+" at 793.87,-3510 h65
  text "I1-" at 1004.97,-3510 h65
  text "I2+" at 1193.87,-3510.37 h65
  text "I2-" at 1404.97,-3510.37 h65
  text "I3+" at 1593.87,-3509.89 h65
  text "I3-" at 1804.97,-3509.89 h65
  text "I4+" at 1993.87,-3509.89 h65
  text "I4-" at 2204.97,-3509.89 h65
Bottom Overlay:
  lines w6: 3055,-275 3055,-220 ; 3070,-135 3170,-135
  lines w10: 3116.92,-84.34 ccw(c3055,-135) 3119.51,-182.31
  text "-" at 3075,-330 h65

## Text inside footprints (layer, text, board x,y; h text height)
D46: Top Overlay "+" at 795,-975 h65 r270
D47: Top Overlay "+" at 1045,-975 h65 r270
D48: Top Overlay "+" at 1295,-975 h65 r270
D49: Top Overlay "+" at 1545,-975 h65 r270